# Altium PCB SENSEI_Base-Board.PcbDoc (part 7 of 10)
Units mm, origin at the board's own origin, x right, y up, seen from the top; angles counter-clockwise.
Board outline 51.6 x 28.1 mm, 8 copper layers (Top Sig/Pwr, GND1, Sig1, GND2, Sig2, Pwr, GND3, Bot Sig/Pwr), stack 1.53 mm thick; 209 components, 201 nets, 1031 pads, 2222 vias.
Unrouted connection lines stored in the file: 214.
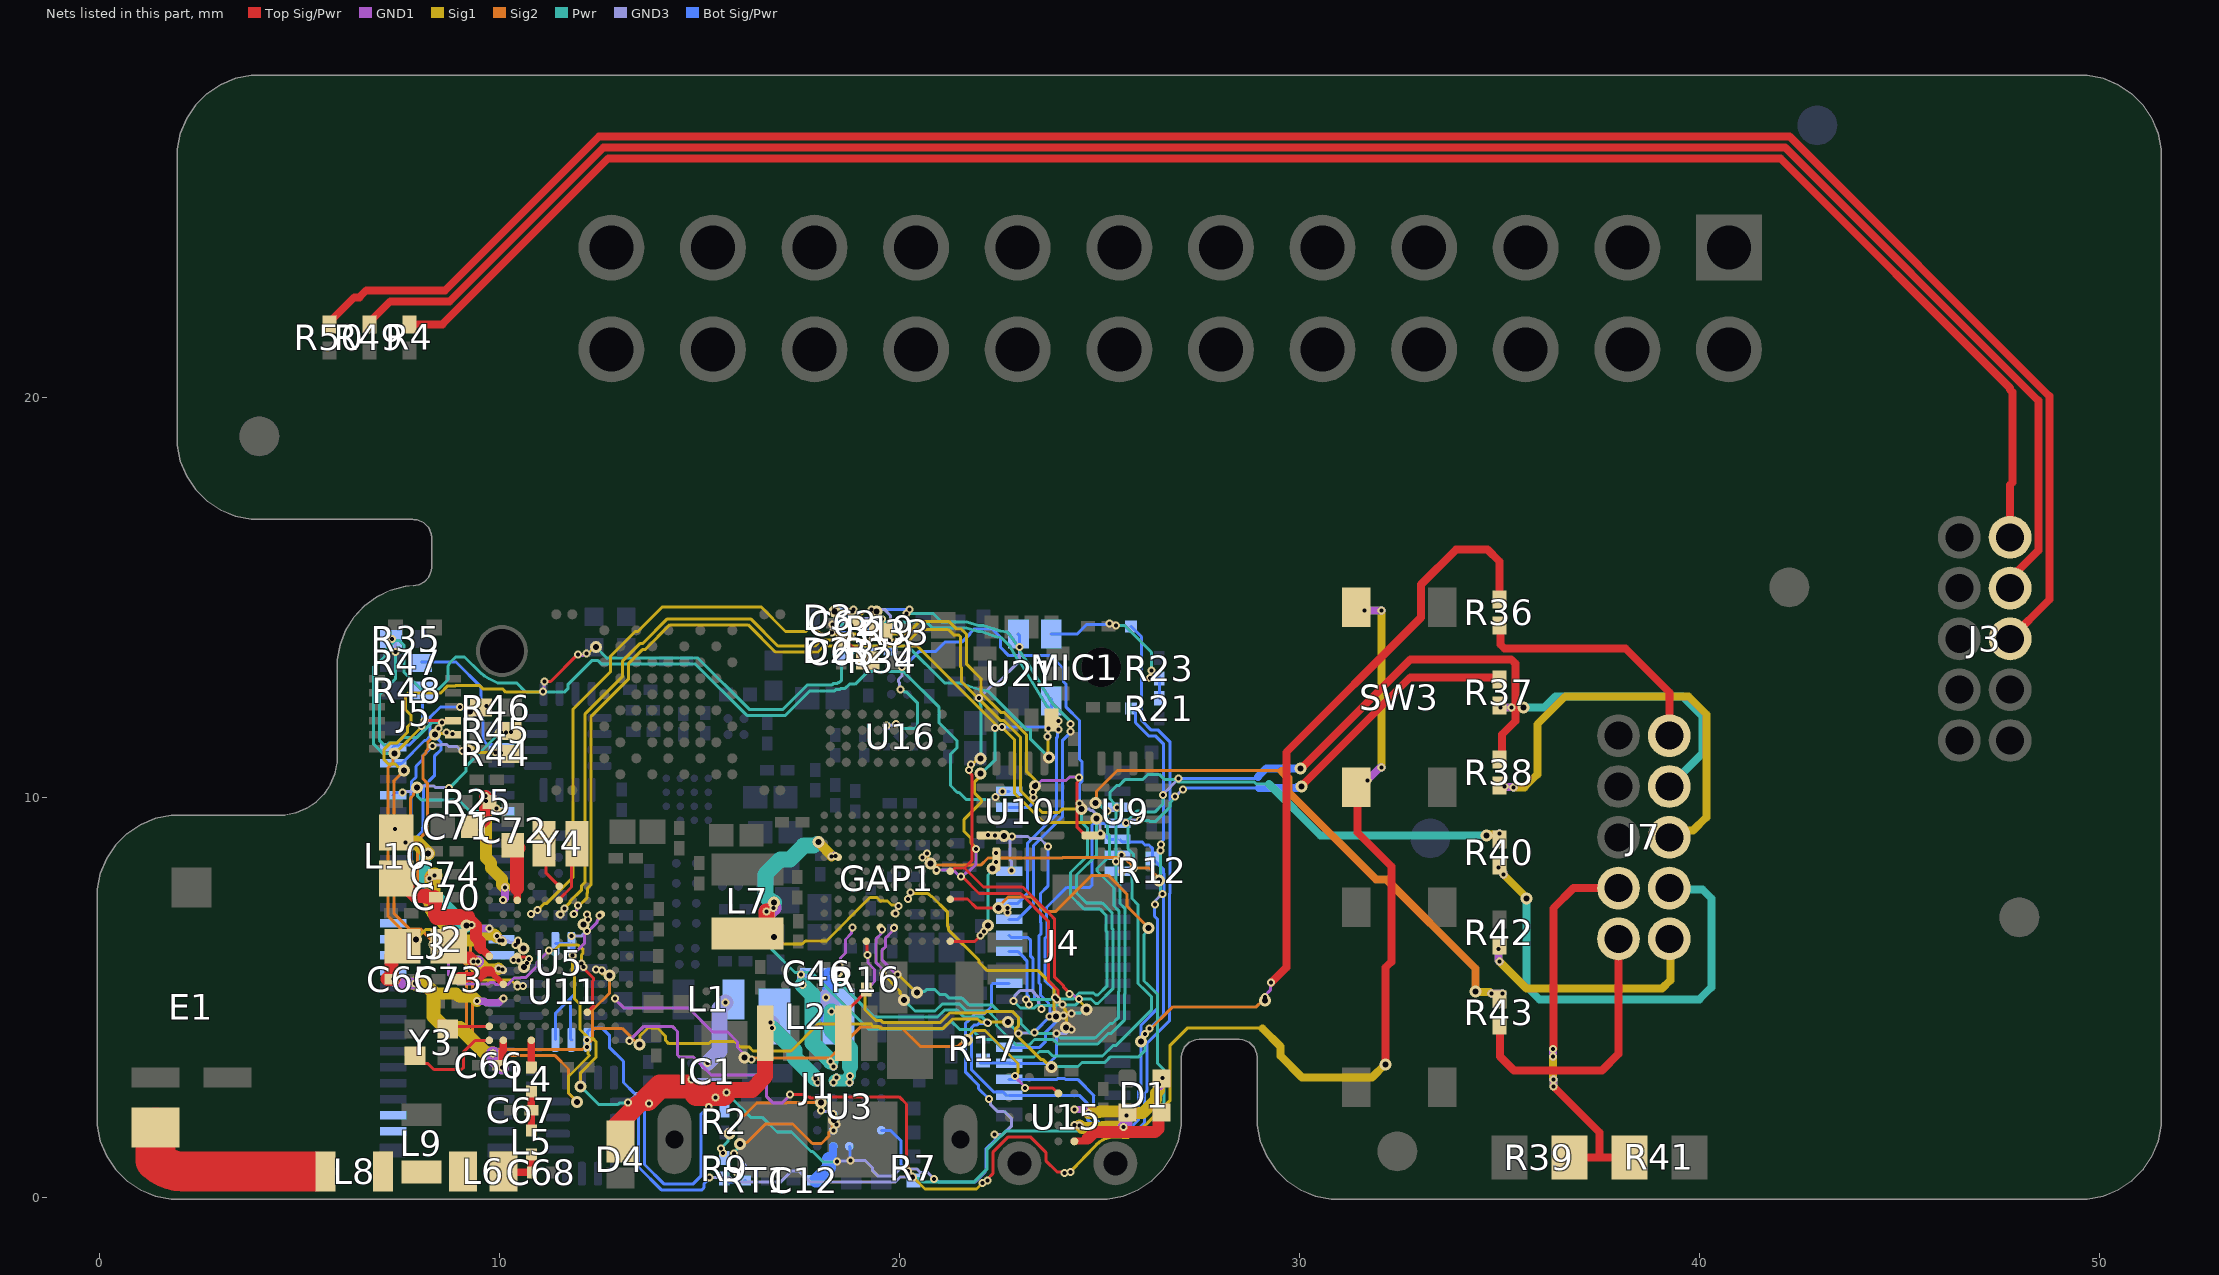
[diagram p12: the nets of this part, all layers, seen from the top]

## Via types
v1: diameter 0.2, hole 0.1, Top Sig/Pwr to GND1, 544 vias
v2: diameter 0.2, hole 0.1, GND3 to Bot Sig/Pwr, 436 vias
v3: diameter 0.2, hole 0.1, GND1 to Sig1, 385 vias
v4: diameter 0.3, hole 0.15, Sig1 to Pwr, 293 vias
v5: diameter 0.3, hole 0.15, Top Sig/Pwr to Bot Sig/Pwr, tented both sides, 284 vias
v6: diameter 0.2, hole 0.1, Pwr to GND3, 280 vias

## Nets (pads, with @x,y where several pads share a name; then routed paths per layer and width w, separated by ;. In a path a pad name is that pad's centre, name@x,y a point inside that pad or via, vN(x,y) a via of type N, cw(c..) or ccw(c..) an arc to the next point about the centre after c; other vN are vias at no path point) (continued)
I2C_B_SDA_GAP: GAP1.K4 U11.5 | length 31.4
  Top Sig/Pwr w0.075: GAP1.K4@21.275,7.45 21.285,7.46 21.705,7.46 21.939,7.226 v1(22.7,7.226)
  GND1 w0.075: v1(22.7,7.226) 22.7,7.124 v3(22.704,7.119)
  Sig2 w0.075: v4(22.483,7.231) 22.483,7.265 22.722,7.505 23.294,7.505 23.658,7.14 23.902,7.14 24.811,8.05 25.223,8.05 25.695,7.578 25.695,7.274 v4(26.233,6.736)
  GND3 w0.075: v2(15.25,0.5) 15.753,0.5 15.866,0.387 17.037,0.387 17.312,0.663 17.488,0.663 17.763,0.387 19.907,0.387 20.032,0.512 20.334,0.512 v6(20.348,0.499)
  Sig1 w0.075: v4(22.483,7.231) 22.526,7.188 22.602,7.188 22.671,7.119 v3(22.704,7.119)
  Pwr w0.075: v6(20.348,0.499) 20.372,0.475 20.5,0.475 20.587,0.387 21.875,0.387 22.187,0.7 22.187,1.187 22.529,1.528 22.534,1.528 22.668,1.663 26.311,1.663 26.613,1.964 26.613,3.193 26.461,3.344 26.461,5.071 26.208,5.324 26.204,5.324 26.12,5.408 26.12,6.569 26.217,6.666 v4@26.217,6.698
  Bot Sig/Pwr w0.075: U11.5@12.2,3.938 12.2,4.131 12.262,4.193 12.362,4.193 12.398,4.229 12.574,4.229 12.751,4.052 12.751,3.75 13.103,3.398 13.103,2.87 13.376,2.598 13.402,2.598 13.479,2.521 13.479,0.758 14.05,0.187 15.067,0.187 15.12,0.24 15.12,0.336 15.25,0.466 v2(15.25,0.5)
I2C_GAP_SEL: U5.H10 U11.6 U11.7 U11.14 U11.15 | length 5.2
  Top Sig/Pwr w0.075: v1(12.195,7.071) 12.196,7.071 U5.H10@12.2,7.075
  GND1 w0.075: v1(12.195,7.071) 12.208,7.058 12.208,6.961 v3(12.221,6.948)
  GND3 w0.075: v2(11.8,6.538) 12.062,6.538 12.181,6.657 v6(12.196,6.657)
  Sig1 w0.075: v4(12.099,6.825) v3(12.221,6.948)
  Pwr w0.075: v4(12.099,6.825) 12.099,6.788 12.196,6.691 v6(12.196,6.657)
  Bot Sig/Pwr w0.075: U11.7@11.4,3.942 11.4,4.593 11.782,4.975 ; U11.14@11.4,6.342 11.738,6.342 11.8,6.281 U11.15@11.8,6.184 ; U11.15@11.8,6.342 11.855,6.287 11.855,5.943 11.886,5.912 11.886,5.079 11.782,4.975 ; U11.6@11.813,3.929 11.782,3.961 11.782,4.975
IMU_INT1: U5.H3 U21.4 | length 34.8
  Top Sig/Pwr w0.075: v1(11.135,12.897) 11.286,12.897 v1(11.962,13.573) ; v1(12.106,5.761) 12.106,5.727 12.35,5.483 12.35,5.418 12.332,5.4 12.332,4.885 12.35,4.867 12.35,4.775 U5.H3@12.2,4.625
  GND1 w0.075: v3(8.581,6.141) 8.734,5.988 8.734,5.555 8.953,5.336 9.742,5.336 9.775,5.369 9.863,5.369 9.917,5.315 10.203,5.315 10.367,5.48 10.427,5.48 10.433,5.486 10.534,5.486 10.538,5.49 10.657,5.49 10.937,5.769 10.937,5.869 v3(11.24,6.173) ; v3(11.092,12.646) 11.113,12.667 11.113,12.875 v1(11.135,12.897) ; v1(11.962,13.573) 11.996,13.573 12.02,13.549 12.104,13.549 12.15,13.595 v3(12.184,13.595) ; v3(12.05,5.85) 12.05,5.817 v1(12.106,5.761) ; v3(23.7,11.523) 23.713,11.536 23.713,11.713 v1(23.725,11.725)
  Sig2 w0.075: v4(7.619,10.669) 7.619,10.665 7.373,10.419 7.373,7.087 7.75,6.711 8.022,6.711 8.376,6.356 v4(8.376,6.315)
  Sig1 w0.075: v4(7.619,10.669) 7.566,10.669 7.407,10.829 7.231,10.829 7.123,10.936 7.123,11.2 7.286,11.362 7.447,11.362 7.701,11.617 7.701,11.755 7.788,11.841 7.788,12.059 7.65,12.196 7.65,12.532 7.721,12.604 8.529,12.604 8.711,12.786 8.908,12.786 8.922,12.8 9.499,12.8 9.587,12.712 10.075,12.712 ; v4(8.376,6.315) 8.391,6.315 8.566,6.141 v3(8.581,6.141) ; 10.08,12.712 10.164,12.628 11.074,12.628 v3(11.092,12.646) ; v3(11.24,6.173) 11.252,6.184 11.382,6.184 11.508,6.31 11.971,6.31 12.096,6.186 12.096,6.105 12.054,6.063 12.054,5.854 v3(12.05,5.85) ; v3(12.184,13.595) 12.218,13.595 12.379,13.756 v4(12.415,13.756) ; v3(23.7,11.523) 23.719,11.505 23.719,11.019 v4(23.738,11)
  Pwr w0.075: v4(12.415,13.756) 12.692,13.479 14.97,13.479 16.249,12.201 17.092,12.201 17.705,12.813 18.323,12.813 18.359,12.849 18.457,12.849 18.481,12.873 18.508,12.873 18.552,12.917 18.552,13.315 19.024,13.788 20.202,13.788 21.128,12.861 21.498,12.861 22.017,12.687 22.083,12.687 22.223,12.649 23.171,11.7 23.275,11.7 23.275,11.463 v4(23.738,11)
IND_IN: GAP1.B7 L7.1 | length 4.5
  Top Sig/Pwr w0.15: v1(18.41,8.534) 18.431,8.534 18.466,8.5 GAP1.B7@18.475,8.5
  Top Sig/Pwr w0.4: L7.1@16.2,6.6 16.475,6.6 16.675,6.8 v1(16.675,7.15)
  GND1 w0.15: v1@18.376,8.568 18.362,8.568 18.315,8.521 v3(18.301,8.521) 18.307,8.528 18.404,8.528 v1(18.41,8.534)
  GND1 w0.4: v1(16.675,7.15) 16.759,7.15 16.846,7.237 v3(16.861,7.237)
  Sig1 w0.2: v3(16.861,7.237) 16.861,7.359 v4(16.873,7.371)
  Sig1 w0.25: v4(17.978,8.888) 17.978,8.874 18.301,8.551 v3(18.301,8.521)
  Pwr w0.3: 17.85,8.789 17.948,8.888 v4(17.978,8.888)
  Pwr w0.4: v4(16.873,7.371) 16.823,7.371 16.65,7.544 16.65,8.075 17.024,8.449 17.27,8.449 17.61,8.789 17.85,8.789
JTAG_T\R\S\T\: GAP1.F2 J4.3 R43.2 | length 27.7
  GND1 w0.075: v1(19.87,6.733) 19.87,6.7 19.74,6.57 19.74,6.567 19.658,6.485 19.658,6.272 19.572,6.186 19.572,5.924 19.921,5.575 v3(19.95,5.575)
  GND1 w0.2: v3(34.8,5.1) v1(35.075,5.1)
  Sig2 w0.075: v4(24.905,9.862) 24.935,9.892 24.935,10.159 25.447,10.671 29.54,10.671 29.558,10.653
  Sig2 w0.2: 29.558,10.653 29.725,10.486 29.725,10.14 31.923,7.943 32.183,7.943 34.4,5.726 v4(34.4,5.15)
  GND3 w0.075: v6(25.205,9.653) 25.229,9.677 25.346,9.677 25.415,9.745 v2(25.449,9.745)
  Sig1 w0.075: v3(19.95,5.575) 19.967,5.575 20.429,5.114 v4(20.446,5.114)
  Sig1 w0.2: v4(34.4,5.15) 34.419,5.131 34.769,5.131 v3(34.8,5.1)
  Pwr w0.075: v4(20.446,5.114) 20.479,5.147 20.634,5.147 20.677,5.19 20.894,5.19 21.017,5.067 21.158,5.067 21.246,4.979 21.571,4.979 21.739,4.811 22.311,4.811 22.473,4.649 22.821,4.649 23.047,4.423 23.047,4.333 23.287,4.093 23.913,4.093 24.026,3.98 24.896,3.98 25.157,4.241 25.168,4.241 25.271,4.344 25.329,4.344 25.486,4.501 25.486,5.15 25.487,7.162 25.365,7.283 25.365,7.734 24.943,8.156 24.943,8.218 25.253,8.529 25.253,9.05 25.205,9.098 v6(25.205,9.653) 25.171,9.653 24.962,9.862 v4(24.905,9.862)
JTAG_TCK: GAP1.G4 J4.5 R37.2 | length 23.6
  Top Sig/Pwr w0.2: v5(30.05,10.275) 32.775,13 R37.2@35,13
  GND1 w0.075: v1(20.216,7.457) 20.24,7.481 20.24,7.557 20.275,7.591 v3(20.275,7.625)
  GND3 w0.075: v6(23.752,4.519) 23.752,4.531 23.897,4.675 v2(23.897,4.99) ; v2(25.669,9.362) 25.7,9.362 25.776,9.438 v6(26.023,9.438) ; v6(26.894,10.025) 26.908,10.025 27.082,10.199 v2(27.097,10.199)
  Sig1 w0.075: v3(20.275,7.625) 20.299,7.601 20.711,7.601 20.749,7.563 20.755,7.563 20.799,7.519 20.82,7.519 21.199,7.14 21.199,6.79 21.226,6.764 21.226,6.691 21.992,5.925 21.992,5.873 22.201,5.665 23.472,5.665 23.863,5.275 23.863,4.729 23.88,4.712 23.88,4.569 v4(23.923,4.526)
  Pwr w0.075: v6(23.752,4.519) 23.755,4.522 23.92,4.522 v4(23.923,4.526) ; v6(26.023,9.438) 26.043,9.417 26.235,9.417 26.253,9.4 26.411,9.4 26.763,9.752 26.763,9.86 26.894,9.991 v6(26.894,10.025)
  Bot Sig/Pwr w0.075: v2(23.897,4.99) 23.873,5.014 23.873,5.193 23.638,5.428 23.638,6.469 23.696,6.527 23.696,6.921 23.68,6.936 23.68,7.242 24.188,7.75 24.769,7.75 24.813,7.794 24.813,9.3 24.856,9.344 J4.5@25.442,9.344 ; J4.5@25.455,9.35 25.467,9.362 v2(25.669,9.362) ; v2(27.097,10.199) 27.121,10.223 27.18,10.223 27.195,10.237 28.987,10.237
  Bot Sig/Pwr w0.2: 28.987,10.237 29.926,10.237 29.945,10.256 30.031,10.256 v5(30.05,10.275)
JTAG_TDI: GAP1.E2 J4.9 R40.2 | length 25.5
  GND1 w0.075: v1(19.567,6.7) 19.543,6.676 19.543,6.583 19.422,6.462 19.422,5.862 19.566,5.718 19.566,5.605 v3(19.59,5.581)
  GND1 w0.2: v1(34.987,8.874) 35,8.886 v3(35,9.1)
  GND3 w0.075: v6(25.417,8.392) 25.417,8.401 25.561,8.545 v2(25.561,8.554)
  Sig1 w0.075: v3(19.59,5.581) 20.023,5.147 20.023,5.086 20.121,4.988 v4(20.121,4.928)
  Sig1 w0.2: v4(34.675,9.05) 34.694,9.069 34.969,9.069 v3(35,9.1)
  Pwr w0.075: v4(20.121,4.928) 20.392,4.656 20.894,4.656 21.067,4.829 21.509,4.829 21.677,4.661 22.215,4.661 22.432,4.444 22.432,4.296 22.922,3.806 23.246,3.806 23.383,3.943 23.849,3.943 23.962,3.83 24.958,3.83 25.219,4.091 25.288,4.091 25.636,4.439 25.636,5.088 ; 25.637,5.088 25.637,7.224 25.515,7.345 25.515,7.796 25.417,7.894 v6(25.417,8.392) 25.417,9.739 25.38,9.777 25.38,9.779 25.358,9.8 25.358,9.869 25.272,9.956 25.272,10.132 25.431,10.291 25.49,10.291 25.65,10.451 26.095,10.451 26.219,10.575 26.496,10.575 26.621,10.451 26.905,10.451 26.968,10.388 28.868,10.388 28.923,10.332 29.244,10.332 29.246,10.33
  Pwr w0.2: 29.246,10.33 30.526,9.05 v4(34.675,9.05)
JTAG_TDO: GAP1.F3 J4.11 R38.2 | length 35
  Top Sig/Pwr w0.2: v5(30.025,10.725) 30.052,10.725 32.777,13.45 35.297,13.45 35.4,13.347 35.4,11.903 35.072,11.575 35.072,11.072 R38.2@35,11
  GND1 w0.075: v1(19.909,7.1) 19.933,7.124 19.933,7.205 19.977,7.249 v3(19.977,7.283)
  GND3 w0.075: v2(25.569,8.147) 25.602,8.147 25.653,8.198 25.826,8.198 v6(25.85,8.222) ; v6(26.587,10.057) 26.587,10.072 26.975,10.46 v2(26.975,10.475)
  Sig1 w0.075: v4(16.861,6.511) 16.922,6.511 16.992,6.441 16.999,6.441 17.107,6.334 17.574,6.334 17.649,6.41 18.18,6.41 19.264,7.493 19.442,7.493 19.526,7.409 19.703,7.409 19.806,7.306 19.953,7.306 v3(19.977,7.283)
  Pwr w0.075: v4(16.861,6.511) 16.818,6.468 16.818,6.294 16.81,6.286 16.81,6.204 17.395,5.619 17.811,5.619 19.217,4.213 20.032,4.213 20.038,4.206 21.081,4.206 21.254,4.379 21.322,4.379 21.508,4.193 21.803,4.193 21.996,4 22.063,4 22.113,3.95 22.348,3.95 22.792,3.506 23.37,3.506 23.507,3.643 23.724,3.643 23.837,3.53 25.083,3.53 25.344,3.791 25.412,3.791 26.311,4.69 26.311,5.009 26.157,5.162 26.154,5.162 25.97,5.346 25.97,7.315 25.815,7.47 25.815,7.918 ; 25.815,7.919 25.815,8.076 25.826,8.087 25.826,8.198 v6(25.85,8.222) 25.85,8.584 25.717,8.716 25.717,9.432 25.937,9.653 26.142,9.653 26.166,9.628 26.383,9.628 26.561,9.805 26.561,9.807 26.587,9.834 v6(26.587,10.057)
  Bot Sig/Pwr w0.075: v2(26.975,10.475) 28.925,10.475 28.962,10.512
  Bot Sig/Pwr w0.2: 28.962,10.512 29.175,10.725 v5(30.025,10.725)
JTAG_TMS/CS_RAM_GATE: GAP1.D1 J4.7 R12.2 R36.2 U16.2 | length 48.4
  Top Sig/Pwr w0.075: GAP1.D1@19.175,6.4 19.191,6.384 19.191,6.074 v1(19.206,6.059)
  Top Sig/Pwr w0.2: v1(29.299,5.373) v1(29.299,5.373) 29.675,5.748 29.675,11.125 33.044,14.494 33.044,15.318 33.923,16.196 34.704,16.196 35,15.9 R36.2@35,15
  GND1 w0.075: v1(19.206,6.059) 19.216,6.048 19.216,5.856 19.378,5.694 19.378,5.393 19.275,5.29 19.275,5.197 v3(19.251,5.173) ; v3(29.143,5.012) 29.143,5.046 29.275,5.177 29.275,5.349 v1(29.299,5.373)
  Sig2 w0.075: v4(26.038,3.9) 26.038,3.909 26.218,4.09 26.218,4.143 26.838,4.763 28.927,4.763 29.085,4.92 v4(29.141,4.92)
  GND3 w0.075: v2(19.685,11.789) 19.708,11.813 19.9,11.813 v6(19.924,11.836) ; v6(20.025,12.7) 20.001,12.724 20.001,12.865 19.978,12.888 19.978,12.95 20.066,13.038 v2(20.066,13.261) ; v2(24.51,9.84) 24.544,9.84 24.671,9.713 24.737,9.713 24.777,9.673 24.827,9.673 24.951,9.549 24.951,9.523 25.013,9.462 25.013,9.104 v2(25.025,9.091) ; v6(26.139,4.078) 26.139,4.09 26.26,4.211 v2(26.26,4.222)
  Sig1 w0.075: v3@19.249,5.173 19.249,5.168 19.148,5.067 19.148,4.68 19.342,4.486 19.349,4.486 19.41,4.425 19.539,4.425 19.6,4.365 21.018,4.365 21.264,4.61 22.137,4.61 22.177,4.649 22.821,4.649 22.975,4.495 22.975,4.278 22.901,4.204 22.901,4.082 23.533,3.449 23.586,3.449 23.784,3.251 v4(23.804,3.251) ; v4(29.141,4.92) 29.143,4.922 v3(29.143,5.012)
  Pwr w0.075: v6(19.924,11.836) 19.958,11.836 20.077,11.716 20.383,11.716 20.458,11.792 20.458,12.354 20.175,12.638 20.121,12.638 20.059,12.7 v6(20.025,12.7) ; v4(23.804,3.251) 23.821,3.268 24.466,3.268 24.568,3.371 24.786,3.371 24.79,3.366 25.131,3.366 25.276,3.511 25.987,3.511 26.139,3.663 26.139,3.9 26.09,3.95 26.09,3.995 v6@26.139,4.045 ; v4(26.038,3.9) 26.038,3.943 v6@26.139,4.045 ; v6@26.139,4.048 v6@26.139,4.045 ; v6(26.139,4.078) v6@26.139,4.045
  Bot Sig/Pwr w0.075: v2(20.066,13.261) 20.112,13.261 20.502,13.65 20.916,13.65 21.153,13.888 21.572,13.888 21.763,14.078 21.763,14.097 21.878,14.213 22.322,14.213 22.531,14.003 22.531,13.75 22.74,13.541 23.787,13.541 24.106,13.223 24.106,12.888 24.172,12.822 24.172,12.253 24.504,11.92 24.504,10.95 24.572,10.882 24.572,10.409 24.51,10.347 v2(24.51,9.84) ; v2(25.025,9.091) 25.039,9.077 25.113,9.077 25.24,8.95 J4.7@25.455,8.95 ; J4.7@25.526,8.935 25.575,8.886 26.067,8.886 26.144,8.809 26.243,8.809 26.325,8.728 R12.2@26.325,8.475 26.611,8.189 26.611,8.098 26.613,8.097 26.613,7.653 26.611,7.652 26.611,4.571 26.263,4.222 v2(26.26,4.222)
LED_EN: U5.K4 U15.A1 | length 13.9
  Top Sig/Pwr w0.075: v1(12.895,4.971) U5.K4@12.9,4.975 ; v1(23.142,2.733) 23.836,2.733 23.961,2.608 U15.A1@23.981,2.608
  GND1 w0.075: v1(12.895,4.971) 12.895,4.953 13.11,4.738 14.728,4.738 15.339,4.127 15.717,4.127 15.958,3.885 15.958,3.743 16.093,3.608 16.148,3.608 v3(16.307,3.449) ; v3(22.888,3.034) 22.888,3.011 23.142,2.757 v1(23.142,2.733)
  Sig2 w0.075: v4(16.131,3.499) 16.142,3.488 18.265,3.488 19.039,4.261 19.526,4.261 19.572,4.215 20.082,4.215 20.524,3.773 21.476,3.773 21.633,3.931 v4(21.694,3.931)
  Sig1 w0.075: v4(16.131,3.499) 16.157,3.473 16.283,3.473 v3(16.307,3.449) ; v4(21.694,3.931) 21.694,3.989 21.875,4.17 22.143,4.17 22.967,3.346 22.967,3.114 22.944,3.091 22.944,3.085 22.893,3.034 v3(22.888,3.034)
MIC_CLK: GAP1.J6 J4.36 MIC1.6 R17.2 | length 16
  Top Sig/Pwr w0.075: GAP1.J6@20.925,8.15 20.925,8.179 v1(20.934,8.188) ; v1(21.544,8.018) 21.571,8.018 21.995,7.595 23.034,7.595 23.727,6.902 23.727,5.42 23.969,5.177 23.969,4.974 v1(23.945,4.95)
  GND1 w0.075: v1(20.934,8.188) 21.34,8.188 21.51,8.018 v1(21.544,8.018) 21.578,8.018 21.708,8.149 21.745,8.149 21.915,8.319 v3(21.915,8.704) ; v1(23.945,4.95) v1(23.945,4.95) 24.075,4.819 v3(24.075,4.817)
  GND3 w0.075: v6(22.397,11.736) 22.407,11.746 22.555,11.746 v2(22.565,11.756) ; v2(23.935,4.1) 24.179,4.1 24.271,4.192 v6(24.304,4.192)
  Sig1 w0.075: 21.886,10.103 22.05,9.938 22.05,9.876 21.624,9.45 21.624,9.143 21.791,8.975 21.791,8.861 21.915,8.737 v3(21.915,8.704) ; 21.886,10.103 21.886,10.389 22.035,10.538 v4(22.035,10.599) ; v3(24.075,4.817) 24.075,4.784 24.138,4.721 24.138,4.682 24.186,4.634 24.186,4.259 v4(24.17,4.243)
  Pwr w0.075: v4(22.035,10.599) 22.058,10.599 22.397,10.938 v6(22.397,11.736) ; v4(24.17,4.243) 24.253,4.243 v6(24.304,4.192)
  Bot Sig/Pwr w0.075: R17.2@22.013,3.362 22.745,3.362 J4.36@22.779,3.362 ; v2(22.565,11.756) 23.731,11.756 23.806,11.831 MIC1.6@23.806,12.454 ; J4.36@22.745,3.343 22.779,3.343 23.731,3.343 23.935,3.546 v2(23.935,4.1)
MIC_DATA: GAP1.K6 J4.34 MIC1.1 | length 14.9
  Top Sig/Pwr w0.075: GAP1.K6@21.275,8.15 21.305,8.15 21.386,8.231 21.632,8.231 ; v1(21.737,10.677) 21.737,10.637 21.812,10.562 21.812,8.411 21.632,8.231 ; v1(24.261,5.079) 24.261,5.098 24.109,5.25 24.109,5.281 23.877,5.513 23.877,6.964 23.778,7.062 23.084,7.756 22.106,7.756 21.632,8.231
  GND1 w0.075: v1(21.737,10.677) 21.761,10.701 21.761,10.757 21.787,10.782 v3(21.787,10.816) ; v1(24.261,5.079) 24.269,5.071 24.342,5.071 24.461,4.952 v3(24.495,4.952)
  GND3 w0.075: v6(21.994,12.476) 22.361,12.844 22.444,12.844 22.999,13.398 v2(22.999,13.763) ; v2(24.109,4.547) 24.131,4.569 24.289,4.569 v6(24.31,4.59)
  Sig1 w0.075: v3(21.787,10.816) 21.82,10.816 21.978,10.974 v4(22.035,10.974) ; v3(24.495,4.952) 24.495,4.918 24.682,4.73 v4(24.682,4.695)
  Pwr w0.075: v6(21.994,12.476) 22.037,12.288 22.037,10.975 v4(22.035,10.974) ; v6(24.31,4.59) 24.325,4.605 24.531,4.605 24.621,4.695 v4(24.682,4.695)
  Bot Sig/Pwr w0.075: J4.34@22.745,3.75 23.508,3.75 23.661,3.903 23.661,4.128 24.081,4.547 v2(24.109,4.547) ; MIC1.1@22.965,14.086 22.999,14.051 v2(22.999,13.763)
MIC_THSEL: GAP1.H7 J4.38 MIC1.5 | length 21.9
  GND1 w0.075: v1(20.579,8.501) 20.587,8.501 20.68,8.594 v3(20.688,8.594)
  Sig2 w0.075: v4(20.776,8.346) 20.818,8.304 21.076,8.304 21.078,8.302 22.034,8.302 22.216,8.484 24.076,8.484 24.092,8.5 25.611,8.5 25.881,8.23 26.246,8.23 26.407,8.069 26.407,8.049 26.495,7.961 v4(26.495,7.921)
  GND3 w0.075: v2(26.393,7.325) 26.403,7.335 26.403,7.419 26.561,7.576 v6(26.582,7.576) ; v6(26.533,8.667) 26.541,8.674 26.541,8.814 v2(26.549,8.822)
  Sig1 w0.075: v3(20.688,8.594) 20.712,8.57 20.712,8.505 20.733,8.484 20.733,8.389 v4(20.776,8.346)
  Pwr w0.075: v4@26.411,7.872 26.411,7.932 26.533,8.055 v6(26.533,8.667) ; v4(26.495,7.921) 26.439,7.865 26.486,7.865 26.534,7.817 26.534,7.659 26.582,7.61 v6(26.582,7.576)
  Bot Sig/Pwr w0.075: J4.38@22.745,2.95 23.944,2.95 23.96,2.966 24.136,2.966 24.152,2.95 24.458,2.95 24.862,2.546 24.852,2.535 24.852,2.014 25.078,1.787 25.832,1.787 25.978,1.934 25.978,2.657 26.048,2.726 26.048,4.31 26.461,4.724 26.461,6.946 26.379,7.028 26.379,7.311 v2(26.393,7.325) ; MIC1.5@25.79,12.225 25.903,12.113 25.903,11.865 26.241,11.527 26.413,11.527 26.611,11.329 26.611,8.947 26.593,8.929 26.573,8.909 26.573,8.846 v2(26.549,8.822)
MIC_WAKE: GAP1.C2 J4.40 MIC1.4 | length 25.8
  GND1 w0.075: v3(18.503,5.801) 18.527,5.825 18.527,5.983 18.653,6.108 18.653,6.444 18.807,6.599 18.807,6.717 v1(18.831,6.741)
  GND3 w0.075: v2(22.197,4.37) 22.211,4.356 v6(22.22,4.356)
  Sig1 w0.075: v4(18.46,5.637) 18.482,5.658 18.482,5.78 v3(18.503,5.801)
  Pwr w0.075: v4(18.46,5.637) 18.5,5.596 18.5,5.375 19.362,4.513 20.156,4.513 20.163,4.506 20.956,4.506 21.129,4.679 21.446,4.679 21.615,4.511 22.064,4.511 v6(22.22,4.356)
  Bot Sig/Pwr w0.075: v2(22.197,4.37) 22.173,4.346 21.986,4.346 21.947,4.307 21.871,4.307 21.805,4.241 21.805,4.105 21.799,4.099 21.799,3.585 21.799,3.198 22.369,2.628 22.598,2.628 J4.40@22.686,2.54 ; J4.40@22.745,2.55 23.951,2.55 23.96,2.541 24.136,2.541 24.145,2.55 24.5,2.55 24.702,2.348 24.702,1.952 24.81,1.844 24.81,1.825 24.998,1.637 25.894,1.637 26.128,1.872 26.128,2.595 26.198,2.664 26.198,3.859 26.761,4.423 26.761,7.59 26.763,7.591 26.763,8.146 26.763,9.698 26.763,11.302 26.762,11.389 26.475,11.677 26.322,11.677 ; MIC1.4@25.79,14.275 26.053,14.012 26.053,11.927 26.302,11.678 26.321,11.678
MSP_CS: J2.12 U5.C7 | length 0.7
  Top Sig/Pwr w0.075: U5.C7@10.45,6.025 10.472,6.003 10.655,6.003 10.706,5.952 v1(10.739,5.952)
  GND1 w0.075: v3(10.699,5.852) 10.699,5.878 10.716,5.895 10.716,5.928 v1(10.739,5.952)
  GND3 w0.075: v2(10.357,5.935) 10.364,5.928 10.472,5.928 v6(10.479,5.921)
  Sig1 w0.075: v4(10.615,5.757) 10.615,5.767 v3(10.699,5.852)
MSP_DR1: J2.13 U5.C8 | length 1.1
  Top Sig/Pwr w0.075: U5.C8@10.45,6.375 10.45,6.401 v1(10.466,6.417)
  GND1 w0.075: v3(10.399,6.309) 10.399,6.33 10.466,6.396 v1(10.466,6.417)
  GND3 w0.075: v2(10.009,6.414) 10.223,6.414 10.265,6.373 10.47,6.373 v6(10.473,6.376)
  Sig1 w0.075: v3(10.399,6.309) 10.433,6.309 10.479,6.263 10.563,6.263 v4(10.606,6.22)
  Pwr w0.075: v6(10.473,6.376) 10.473,6.364 10.606,6.231 v4(10.606,6.22)
MSP_DR2: J2.21 U5.H1 | length 15.2
  Top Sig/Pwr w0.075: v1(12.193,3.931) U5.H1@12.2,3.925
  GND1 w0.075: v3(12.193,3.756) v1(12.193,3.931)
  Sig2 w0.075: v4(7.94,10.244) 7.94,10.184 7.855,10.098 7.855,10.055 7.786,9.986 7.786,7.698 8.138,7.346 8.138,7.319 8.46,6.996 8.46,6.932 9.134,6.258 9.134,5.853 9.176,5.811 9.176,4.06 9.687,3.55 11.384,3.55 11.729,3.205 11.729,2.604 v4(11.945,2.388)
  GND3 w0.075: v6(9.925,9.725) 9.959,9.725 10.015,9.669 10.082,9.669 v2(10.106,9.645)
  Sig1 w0.075: v4(11.945,2.388) 11.727,2.605 11.727,3.02 12.253,3.546 12.217,3.582 12.217,3.732 v3(12.193,3.756)
  Pwr w0.075: v4(7.94,10.244) 7.95,10.234 7.95,10.032 8.051,9.931 8.987,9.931 9.27,9.648 9.542,9.648 9.619,9.725 v6(9.925,9.725)
  Bot Sig/Pwr w0.075: J2.21@10.055,9.65 10.101,9.65 v2(10.106,9.645)
MSP_T\R\S\T\: J2.50
MSP_TCK: J2.49
MSP_TDI: J2.39
MSP_TDO: J2.38
MSP_TMS: J2.40
MSP_VCC: J2.37
NetC12_1: C12.1 U3.D1 | length 1.1
  Bot Sig/Pwr w0.2: 18.247,0.957 18.346,1.057 18.346,1.271 U3.D1@18.35,1.275
  Bot Sig/Pwr w0.35: C12.1@17.916,0.425 17.962,0.425 17.968,0.431 17.968,0.469 18.247,0.747 18.247,0.957
NetC46_1: C46.1 L2.1 U3.C5 U3.D5 | length 4
  GND3 w0.2: v2(18.35,2.875) 18.425,2.95 v6(18.425,3) ; v2(18.75,2.875) 18.75,3.012 v6(18.767,3.029)
  GND3 w0.4: v2(18.173,4.993) 18.3,4.866 v6(18.3,4.65)
  Pwr w0.3: v6@18.375,2.925 18.647,2.925 18.765,3.043 18.765,3.265
  Pwr w0.4: v6(18.3,4.65) 18.3,4.19 18.765,3.725 18.765,3.265
  Bot Sig/Pwr w0.35: L2.1@18.252,4.577 C46.1@18.252,5.569
  Bot Sig/Pwr w0.4: L2.1@18.2,4.525 L2.1@18.252,4.577
NetC46_2: C46.2 U3.D6 | length 2.7
  GND3 w0.2: v2(17.537,5.566) 17.537,5.355 v6(17.585,5.306) ; v6(18.283,3.401) 18.283,3.342 v2(18.35,3.275)
  Pwr w0.4: v6(17.585,5.306) 17.825,5.067 17.825,3.858 v6(18.283,3.401)
  Bot Sig/Pwr w0.2: v2(17.537,5.566) 17.562,5.566 C46.2@17.596,5.6
NetC62_1: C62.1 R19.2 R33.1 | length 3.4
  Top Sig/Pwr w0.075: v1(18.7,14.65) 18.818,14.532 18.818,14.444 18.895,14.367 18.983,14.367 19.094,14.256 19.094,14.238 19.207,14.125 R33.1@19.609,14.125
  GND1 w0.075: v1(18.7,14.65) v3(18.824,14.65)
  GND3 w0.075: v6(18.85,14.7) 19.079,14.471 19.549,14.471 v2(19.565,14.455)
  Sig1 w0.075: v4(18.375,14.65) v3(18.824,14.65)
  Pwr w0.075: v4(18.375,14.65) 18.766,14.65 18.816,14.7 v6(18.85,14.7)
  Bot Sig/Pwr w0.075: v2(19.565,14.455) 19.589,14.431 19.589,14.386 19.75,14.225 R19.2@19.8,14.225
NetC63_1: C63.1 R20.2 R34.1 | length 3.7
  Top Sig/Pwr w0.075: C63.1@18.532,13.943 18.607,14.019 v1@18.716,14.019 ; v1(18.775,14.044) 18.687,13.955 18.687,13.893 19.1,13.48 R34.1@19.1,13.475
  GND1 w0.075: v1(18.775,14.044) 18.788,14.056 18.788,14.279 v3(18.8,14.292)
  GND3 w0.075: v6@19.275,14.7 v6(19.3,14.7) ; v6@19.275,14.725 v6(19.3,14.7) ; v2(19.746,13.924) 19.746,13.943 19.78,13.977 19.78,14.54 19.621,14.7 v6(19.3,14.7)
  Sig1 w0.075: v3@18.775,14.3 19.125,14.65 v4(19.429,14.65)
  Pwr w0.075: v6(19.3,14.7) 19.379,14.7 v4(19.429,14.65)
  Bot Sig/Pwr w0.075: v2(19.746,13.924) 19.746,13.704 R20.2@19.775,13.675
NetC65_1: C65.1 C66.1 L3.1 U5.B1 U5.B4 | length 7.8
  Top Sig/Pwr w0.18: 10.076,3.639 10.098,3.661 10.098,3.923 U5.B1@10.1,3.925 ; v1(10.1,4.969) U5.B4@10.1,4.975
  Top Sig/Pwr w0.2: 10.076,3.639 10.076,3.272 C66.1@10.092,3.257
  Top Sig/Pwr w0.35: C65.1@7.204,5.452 7.304,5.452 C65.1@7.308,5.456 ; v1(7.355,5.456) C65.1@7.308,5.456 ; L3.1@7.583,6.275 7.562,6.275 7.308,6.021 C65.1@7.308,5.456
  GND1 w0.18: v3(9.446,4.904) 9.45,4.9 9.633,4.9 9.671,4.862 9.988,4.862 10.095,4.969 v1(10.1,4.969)
  GND1 w0.3: v1(7.355,5.456) 7.466,5.345 v3(7.889,5.345)
  GND1 w0.35: v3(9.843,3.6) 9.843,3.473 v1(10.069,3.247)
  Sig1 w0.3: 8.179,5.251 8.197,5.269 ; 8.325,5.105 8.34,5.09 8.919,5.09 8.992,5.017 9.333,5.017 v3(9.446,4.904)
  Sig1 w0.35: v3(7.889,5.345) 8.111,5.345 8.116,5.35 8.35,5.116 8.35,4.525 8.642,4.234 9.021,4.234 9.654,3.6 v3(9.843,3.6)
NetC67_1: C67.1 L4.2 L5.1 | length 1
  Top Sig/Pwr w0.185: L5.1@10.8,1.625 L5.1@10.8,1.675 10.8,2.025 C67.1@10.8,2.15 ; C67.1@10.8,2.179 L4.2@10.8,2.65
NetC68_1: C68.1 L5.2 L6.1 | length 1
  Top Sig/Pwr w0.185: L6.1@10.175,0.65 10.2,0.625 10.787,0.625 10.8,0.638 L5.2@10.8,0.975
NetC70_1: C70.1 L10.1 U5.A7 | length 3.8
  Top Sig/Pwr w0.18: 9.518,6.269 9.518,6.185 9.529,6.174 9.598,6.174 9.747,6.025 U5.A7@9.75,6.025
  Top Sig/Pwr w0.3: 9.187,7.013 9.271,6.929 9.281,6.929 9.413,6.797 9.413,6.497 9.518,6.391 9.518,6.269
  Top Sig/Pwr w0.35: L10.1@7.298,8.045 7.388,8.045 7.902,7.531 8.181,7.531 8.206,7.506 8.364,7.506 8.371,7.5 8.385,7.5 8.391,7.494 8.391,7.069 8.447,7.013
  Top Sig/Pwr w0.4: 8.447,7.013 9.187,7.013
NetC71_1: C71.1 R25.1 U5.B11 | length 3.6
  Top Sig/Pwr w0.18: v1(10.097,7.427) U5.B11@10.1,7.425
  Top Sig/Pwr w0.3: C71.1@9.598,9.386 9.642,9.43 9.642,9.998 9.667,10.023 9.663,10.023 v1(9.657,10.03)
  GND1 w0.2: v1(10.097,7.427) 10.143,7.473 v3(10.143,7.742)
  GND1 w0.3: v3(9.668,9.912) 9.668,10.019 v1(9.657,10.03) 9.657,9.956 v3@9.669,9.944
  Sig1 w0.3: v3(9.668,9.912) 9.668,8.486 9.792,8.362 9.792,8.233 9.797,8.228 10.072,7.953 10.072,7.813 v3(10.143,7.742)
NetC72_1: C72.1 U5.C11 | length 1.3
  Top Sig/Pwr w0.18: 10.445,7.724 10.448,7.722 10.448,7.427 U5.C11@10.45,7.425
  Top Sig/Pwr w0.35: 10.445,7.724 10.445,8.69 C72.1@10.482,8.726
NetC73_1: C73.1 U5.B5 | length 1.3
  Top Sig/Pwr w0.15: 9.776,5.646 10.096,5.325 U5.B5@10.1,5.325
  Top Sig/Pwr w0.25: C73.1@9,5.5 9.006,5.506 9.506,5.506 9.647,5.647 9.776,5.647
NetC74_1: C74.1 U5.B8 | length 3.5
  Top Sig/Pwr w0.18: v1(10.075,6.425) 10.075,6.4 U5.B8@10.1,6.375
  Top Sig/Pwr w0.2: v1(8.25,7.975) 8.25,7.994 8.331,8.075 C74.1@8.346,8.075
  GND1 w0.18: v3(9.944,6.53) 9.95,6.53 10.051,6.429 10.071,6.429 v1(10.075,6.425)
  GND1 w0.2: v1(8.25,7.975) 8.325,8.05 v3(8.375,8.05)
  Sig1 w0.3: 8.331,7.212 8.331,7.113 9.02,6.425 9.37,6.425 9.422,6.477 9.445,6.477 9.541,6.573 9.869,6.573 v3@9.933,6.509
  Sig1 w0.4: 8.331,7.212 8.331,8.006 v3(8.375,8.05)
NetD1_2: D1.2 U15.B2 | length 2.9
  Top Sig/Pwr w0.18: U15.B2@24.375,2.2 24.379,2.204 24.381,2.204 v1(24.377,2.2)
  GND1 w0.18: v1(24.377,2.2) 24.381,2.196 24.631,2.196 24.723,2.103 v3(24.728,2.103)
  GND1 w0.3: v3(26.49,2.822) 26.49,2.903 v1(26.574,2.987)
  Sig1 w0.3: v3(24.728,2.103) 24.786,2.103 24.891,2.103 25.008,2.137 25.02,2.15 25.763,2.15 25.809,2.103 26.081,2.103 26.422,2.444 26.422,2.607 26.49,2.675 v3(26.49,2.822)
NetD1_3: D1.3 U15.D2 | length 2.7
  Top Sig/Pwr w0.18: U15.D2@24.375,1.4 24.379,1.404 24.647,1.404 24.707,1.464
  Top Sig/Pwr w0.3: 24.707,1.464 24.876,1.633 26.394,1.633 26.475,1.713 26.475,2.065 D1.3@26.57,2.16
NetD1_4: D1.4 U15.C2 | length 1.6
  Top Sig/Pwr w0.18: U15.C2@24.375,1.8 v1(24.375,1.802)
  GND1 w0.18: v1(24.375,1.802) 24.377,1.8 24.508,1.8 v3(24.511,1.798)
  GND1 w0.3: v3(25.607,1.751) 25.679,1.823 v1(25.679,2.05)
  Sig1 w0.3: v3(24.511,1.798) 24.507,1.794 24.573,1.728 25.046,1.728 25.081,1.762 25.176,1.775 25.607,1.775 v3(25.607,1.751)
NetD2_1: D2.1 J4.16 R20.1 | length 14
  GND3 w0.075: v2(18.314,14.114) 18.32,14.119 18.32,14.32 v6(18.325,14.325) ; v2(23.975,11.7) v2(23.975,11.7) 23.976,11.901 v6(23.977,11.902)
  Pwr w0.075: v6(18.325,14.325) 18.713,14.325 18.775,14.388 19.32,14.388 19.538,14.387 20.673,14.388 20.823,14.237 21.65,14.237 cw(c21.65,14.162) 21.672,14.234 21.895,14.167 21.966,14.146 22.043,14.146 22.443,14.01 22.56,13.986 22.582,13.964 22.761,13.785 22.964,13.435 23.007,13.39 23.687,12.28 23.971,11.996 23.971,11.908 v6(23.977,11.902)
  Bot Sig/Pwr w0.075: v2(18.314,14.114) 18.736,14.114 R20.1@19.175,13.675 ; D2.1@18.56,13.691 18.576,13.675 R20.1@19.175,13.675 ; R20.1@19.225,13.675 R20.1@19.175,13.675 ; J4.16@22.745,7.35 22.96,7.35 23.209,7.599 23.209,8.855 23.925,9.571 23.925,11.478 23.951,11.504 23.951,11.676 v2(23.975,11.7)
NetD3_1: D3.1 J4.18 R19.1 | length 13.2
  GND3 w0.075: v6(20.175,14.6) 20.175,14.613 20.25,14.687 v2(20.25,14.7) ; v2(24.275,11.65) 24.277,11.652 24.277,11.836 v6(24.28,11.838)
  Pwr w0.075: v6(20.175,14.6) 20.84,14.6 21.053,14.387 21.674,14.387 cw(c21.674,14.312) 21.695,14.384 21.975,14.3 21.993,14.296 22.105,14.296 22.522,14.159 22.689,14.136 22.747,14.078 22.91,13.848 23.034,13.627 ccw(c23.35,13.804) 23.038,13.619 23.04,13.616 23.056,13.589 23.114,13.497 23.12,13.491 23.152,13.459 23.661,12.622 ccw(c23.992,12.823) 23.663,12.618 23.831,12.349 23.832,12.347 23.838,12.341 24.315,11.865 24.288,11.838 v6(24.28,11.838)
  Bot Sig/Pwr w0.075: D3.1@18.637,14.315 18.639,14.313 19.163,14.313 R19.1@19.25,14.225 19.25,14.441 19.509,14.7 v2(20.25,14.7) ; J4.18@22.745,6.95 22.96,6.95 23.359,7.349 23.359,8.793 24.075,9.509 24.075,11.416 24.275,11.616 v2(24.275,11.65)
NetD4_2: D4.2 J1.1 | length 6.4
  Top Sig/Pwr w0.4: D4.2@12.899,1.796 13.128,2.025 13.462,2.359 ; D4.2@13.025,1.4 13.175,1.55 13.175,1.978 13.509,2.312 13.658,2.46 13.707,2.46 ; 15.601,2.581 15.701,2.681 16.315,2.681 16.476,2.842 16.476,2.859 16.644,3.026 16.644,3.87 J1.1@16.641,3.873
  Top Sig/Pwr w0.5: 14.709,2.775 14.903,2.581 14.931,2.581
  Top Sig/Pwr w0.6: 13.707,2.46 14.015,2.768 14.717,2.768 ; 14.931,2.581 15.601,2.581
NetE1_1: E1.1 L8.2 | length 4.9
  Top Sig/Pwr w1: E1.1@1.4,1.75 1.4,0.925 ccw(c2.089,1.65) 2.087,0.65 5.4,0.65
NetIC1_A2: IC1.A2 L1.1 | length 1.7
  GND3 w0.4: v2(15.206,3.359) 15.5,3.653 15.5,4.714 v2(15.656,4.87)
  Bot Sig/Pwr w0.075: IC1.A2@15.2,3.35 15.2,3.353 v2(15.206,3.359)
NetIC1_B3: IC1.B3 R2.2 | length 1.4
  GND3 w0.075: v2(14.799,2.944) 15.555,2.944 15.581,2.918 15.662,2.838 15.662,2.638 v2(15.675,2.625)
  Bot Sig/Pwr w0.075: IC1.B3@14.8,2.95 IC1.B3@14.8,2.945 ; 15.645,2.352 15.645,2.375 15.675,2.405 v2(15.675,2.625) ; v2(14.799,2.944) IC1.B3@14.8,2.945
NetJ1_4: J1.4 R16.1 | length 1.4
  Top Sig/Pwr w0.075: J1.4@18.6,4.1 18.6,4.596 18.766,4.761 18.795,4.761 18.988,4.953 18.988,4.963 19.175,5.15 R16.1@19.175,5.196
NetJ2_25: J2.25 R47.2 | length 3.6
  Bot Sig/Pwr w0.075: R47.2@8.051,13.38 8.919,13.38 9.546,12.753 9.546,12.306 9.563,12.289 9.563,11.949 9.587,11.925 9.587,11.435 9.7,11.322 9.988,11.322 J2.25@10.056,11.254
NetJ2_26: J2.26 R48.1 | length 1.9
  Bot Sig/Pwr w0.075: J2.26@7.345,11.25 7.398,11.303 7.741,11.303 8.077,11.639 R48.1@8.077,12.674
NetJ2_27: J2.27 R46.1 | length 3.3
  GND1 w0.075: v3(9.458,12.178) 9.492,12.178 9.578,12.264 9.658,12.264 v1(9.682,12.288)
  GND3 w0.075: v2(9.02,12.259) 9.048,12.259 9.189,12.118 v6(9.218,12.118)
  Sig1 w0.075: v4(9.268,12.139) 9.288,12.158 9.438,12.158 v3(9.458,12.178)
  Pwr w0.075: v6(9.218,12.118) 9.247,12.118 v4(9.268,12.139)
  Bot Sig/Pwr w0.075: J2.27@7.345,10.85 7.565,10.85 8.132,11.417 8.169,11.417 8.263,11.511 8.263,11.993 8.529,12.259 v2(9.02,12.259)
NetJ2_29: J2.29 R45.1 | length 3.7
  Top Sig/Pwr w0.075: R45.1@10.285,11.658 10.29,11.653 v1(10.29,11.637)
  GND1 w0.075: v3(10.172,11.623) 10.179,11.63 10.283,11.63 v1(10.29,11.637)
  GND3 w0.075: v2(7.575,10.125) 7.598,10.148 7.788,10.148 7.825,10.185 7.952,10.185 8.054,10.286 8.361,10.286 8.406,10.241 8.734,10.241 v6(8.747,10.229)
  Sig1 w0.075: v4(10.026,11.593) 10.143,11.593 v3(10.172,11.623)
  Pwr w0.075: v6(8.747,10.229) 9.162,10.644 9.162,10.762 9.994,11.593 v4(10.026,11.593)
  Bot Sig/Pwr w0.075: J2.29@7.345,10.05 7.417,10.122 7.575,10.122 v2(7.575,10.125)
NetJ2_31: J2.31 R44.1 | length 4.7
  Top Sig/Pwr w0.075: v1(10.043,11.107) 10.066,11.085 R44.1@10.291,11.085
  GND1 w0.075: v3(9.911,11.12) 9.917,11.114 10.037,11.114 v1(10.043,11.107)
  GND3 w0.075: v2(8.335,11.283) 8.359,11.307 8.543,11.307 8.553,11.317 8.689,11.317 8.734,11.272 8.941,11.272 9.05,11.164 v6(9.083,11.164)
  Sig1 w0.075: v4(9.217,11.188) 9.278,11.188 9.337,11.247 9.464,11.12 v3(9.911,11.12)
  Pwr w0.075: v6(9.083,11.164) 9.107,11.188 v4(9.217,11.188)
  Bot Sig/Pwr w0.075: J2.31@7.345,9.25 7.565,9.25 7.782,9.467 7.782,9.488 7.788,9.493 7.788,10.094 7.807,10.113 7.807,10.393 7.917,10.503 7.917,10.773 8.076,10.932 8.076,11.024 v2(8.335,11.283)
NetJ2_34: J2.34 R35.1 | length 9.1
  GND3 w0.075: v2(7.318,13.953) 7.41,13.862 v6(7.41,13.635) ; v2(8.475,11.725) 8.475,11.754 8.562,11.841 v6(8.562,11.871)
  Pwr w0.075: v6(7.41,13.635) 7.41,12.967 7.002,12.559 7.002,11.429 7.123,11.308 7.185,11.308 7.231,11.354 7.45,11.354 7.585,11.489 7.937,11.489 8.312,11.864 8.555,11.864 v6(8.562,11.871)
  Bot Sig/Pwr w0.075: J2.34@7.345,8.05 7.565,8.05 7.782,8.267 7.782,8.288 7.788,8.293 7.788,8.86 8.082,9.155 8.082,9.24 8.088,9.246 8.088,9.97 8.107,9.989 8.107,10.269 8.376,10.538 8.376,11.024 8.547,11.195 8.547,11.371 8.475,11.443 v2(8.475,11.725)
NetJ3_2: J3.2 R4.1 | length 47.9
  Top Sig/Pwr w0.2: R4.1@7.75,21.825 8.575,21.825 12.725,25.975 42.025,25.975 47.77,20.23 47.77,20.19 47.825,20.135 47.825,17.865 47.77,17.81 J3.2@47.77,16.5
NetJ3_4: J3.4 R49.1 | length 51.2
  Top Sig/Pwr w0.2: R49.1@6.75,21.825 6.75,21.875 7.275,22.4 8.761,22.4 12.611,26.25 42.139,26.25 48.475,19.914 48.475,16.799 48.48,16.794 48.48,16.175 47.77,15.465 J3.4@47.77,15.23
NetJ3_6: J3.6 R50.1 | length 54.1
  Top Sig/Pwr w0.2: R50.1@5.75,21.825 5.75,21.875 6.375,22.5 6.5,22.5 6.675,22.675 8.647,22.675 12.497,26.525 42.253,26.525 48.75,20.028 48.75,16.913 48.755,16.908 48.755,16.092 48.75,16.087 48.75,14.94 J3.6@47.77,13.96
NetJ7_2: J7.2 R36.1 | length 6.2
  Top Sig/Pwr w0.2: R36.1@35,14.175 35.025,14.15 35.025,13.825 35.125,13.725 38.15,13.725 39.25,12.625 J7.2@39.25,11.54
NetJ7_4: J7.4 R37.1 | length 7.5
  GND1 w0.2: v1(35.025,12.25) v3(35.3,12.25)
  Sig1 w0.2: v3(35.3,12.25) v4(35.6,12.25)
  Pwr w0.2: v4(35.6,12.25) 36.125,12.25 36.4,12.525 39.575,12.525 40.075,12.025 40.075,11.095 J7.4@39.25,10.27
NetJ7_6: J7.6 R38.1 | length 10.6
  GND1 w0.2: v1(35.13,10.275) 35.152,10.253 35.347,10.253 v3(35.35,10.25)
  Sig1 w0.2: v3(35.35,10.25) 35.625,10.25 35.95,10.575 35.95,11.825 36.65,12.525 39.725,12.525 40.175,12.075 40.175,9.5 39.841,9.166 39.416,9.166 J7.6@39.25,9
NetJ7_7: J7.7 R39.2 R41.2 | length 10.1
  Top Sig/Pwr w0.2: v1(36.343,3.708) 36.35,3.714 36.35,7.225 36.855,7.73 J7.7@37.98,7.73 ; v1(36.35,2.775) 37.5,1.625 37.5,1.025 ; R39.2@36.75,1 37.5,1 R41.2@38.25,1 38.283,1 R41.2@38.332,1.049
  GND1 w0.2: v3(36.343,3.522) v1(36.343,3.708) ; v1(36.35,2.775) v3(36.35,2.95)
  Sig1 w0.2: v3(36.343,3.522) 36.343,2.957 v3(36.35,2.95)
NetJ7_8: J7.8 R40.1 | length 11.5
  GND1 w0.2: v1(34.975,8.25) 35.1,8.125 v3(35.1,8.075)
  Sig1 w0.2: v3(35.1,8.075) 35.675,7.5 v4(35.675,7.475)
  Pwr w0.2: v4(35.675,7.475) 35.675,5.275 36,4.95 40,4.95 40.3,5.25 40.3,7.475 40.085,7.69 39.29,7.69 J7.8@39.25,7.73
NetJ7_9: J7.9 R43.1 | length 6.9
  Top Sig/Pwr w0.2: R43.1@34.965,4.248 35.017,4.196 35.017,3.518 35.364,3.172 37.565,3.172 37.98,3.587 J7.9@37.98,6.46
NetJ7_10: J7.10 R42.1 | length 6
  GND1 w0.2: v1(34.977,6.208) 34.977,5.917 v3(35.002,5.892)
  Sig1 w0.2: v3(35.002,5.892) 35.677,5.217 39.067,5.217 39.275,5.425 J7.10@39.275,6.425
NetL2_2: L2.2 U3.E5 | length 2
  GND3 w0.2: v6(17.9,2.975) 17.95,2.925 v2(17.95,2.875)
  GND3 w0.4: v2(16.777,4.367) 16.813,4.331 v6(16.813,4.237)
  Pwr w0.4: v6(16.813,4.237) 17.384,3.666 17.384,3.491 v6(17.9,2.975)
NetL3_2: L3.2 U5.B6 | length 1.5
  Top Sig/Pwr w0.18: v1(10.074,5.701) U5.B6@10.1,5.675
  Top Sig/Pwr w0.3: L3.2@8.976,6.294 8.976,6.058 9.038,5.996 9.261,5.996 9.356,5.901 v1(9.36,5.901)
  GND1 w0.18: v3(9.976,5.726) 9.98,5.722 10.009,5.722 10.026,5.705 10.071,5.705 v1(10.074,5.701)
  GND1 w0.3: v1(9.36,5.901) 9.469,5.901 v3(9.471,5.899)
  Sig1 w0.3: v3(9.471,5.899) 9.671,5.698 9.949,5.698 v3(9.976,5.726)
NetL4_1: L4.1 U5.D1 | length 0.7
  Top Sig/Pwr w0.185: L4.1@10.8,3.225 U5.D1@10.8,3.925
NetL6_2: L6.2 L8.1 L9.2
NetL10_2: L10.2 U5.A9 | length 4.1
  Top Sig/Pwr w0.1: v1(9.749,6.723) v1(9.749,6.723)
  Top Sig/Pwr w0.35: v1(7.389,9.206) 7.411,9.184 L10.2@7.426,9.184
  GND1 w0.1: v1@9.741,6.716 v1(9.749,6.723)
  GND1 w0.2: v3(9.311,6.802) 9.397,6.716 v1@9.741,6.716
  GND1 w0.35: v1(7.389,9.206) 7.389,9.13 v3(7.65,8.869)
  Sig1 w0.1: v4(9.175,6.8) 9.308,6.8 v3(9.311,6.802)
  Sig1 w0.35: v3(7.65,8.869) 7.936,8.869 v4(8.214,8.591)
  Pwr w0.35: v4(8.214,8.591) 8.102,8.48 8.102,7.821 9.124,6.8 v4(9.175,6.8)
NetMIC1_2: MIC1.2 R21.1 R23.2 | length 4.3
  GND3 w0.075: v2(25.26,14.342) 25.281,14.321 25.395,14.321 v6(25.416,14.3) ; v2(26.265,12.987) 26.286,13.007 26.286,13.149 v6(26.306,13.169)
  Pwr w0.075: v6(25.416,14.3) 25.631,14.3 26.306,13.626 v6(26.306,13.169)
  Bot Sig/Pwr w0.075: MIC1.2@23.798,14.087 24.457,14.087 24.693,14.324 25.242,14.324 v2(25.26,14.342) ; v2(26.265,12.987) 26.514,12.987 R23.2@26.525,12.976 ; R21.1@26.5,12.475 26.5,12.929 R23.2@26.514,12.942
NetR7_1: R7.1 U3.A2 | length 1.8
  Bot Sig/Pwr w0.075: U3.A2@19.55,1.675 19.779,1.675 20.046,1.408 20.046,0.82 20.128,0.737 20.153,0.737 20.415,0.475 20.473,0.475 R7.1@20.498,0.45
NetR9_1: R9.1 RT1.1 U3.D2 | length 5.3
  Sig2 w0.075: v4(16.021,1.333) 16.064,1.376 16.199,1.376 16.652,1.829 17.343,1.829 17.825,1.347 18.057,1.347 18.247,1.537 18.247,1.633 18.32,1.706 18.32,1.89 v4(18.363,1.933)
  GND3 w0.075: v6(15.865,1.09) 16.155,0.8 16.155,0.728 16.104,0.677 16.065,0.677 15.988,0.6 v2(15.954,0.6) ; v2(18.35,1.675) 18.35,1.709 18.4,1.759 18.4,1.777 v6@18.43,1.807
  Pwr w0.075: v6(15.865,1.09) 15.865,1.124 16.025,1.283 v4@16.025,1.325 ; v4(18.363,1.933) 18.363,1.878 v6(18.424,1.817)
  Bot Sig/Pwr w0.075: R9.1@15.642,0.501 15.642,0.442 15.703,0.382 15.954,0.382 ; v2(15.954,0.6) 15.954,0.382 ; RT1.1@16.149,0.425 16.106,0.382 15.954,0.382
NetR9_2: R9.2 U3.D3 | length 3.8
  Sig2 w0.075: v4(15.755,1.598) 15.755,1.659 15.878,1.781 15.878,1.796 15.937,1.855 15.937,1.857 16.443,2.363 17.191,2.363 17.193,2.365 v4(18.045,2.365)
  GND3 w0.075: v6(15.538,1.222) 15.538,1.189 15.591,1.136 v2(15.591,1.103) ; v6(18.046,2.171) 18.07,2.147 18.248,2.147 18.314,2.081 v2(18.348,2.081)
  Pwr w0.075: v6(15.538,1.222) 15.712,1.396 15.712,1.555 v4(15.755,1.598) ; v6@18.046,2.172 v4(18.045,2.365)
NetU5_A1: U5.A1 Y3.1 | length 2.4
  Top Sig/Pwr w0.075: Y3.1@8.085,3.47 8.085,3.378 8.113,3.35 8.205,3.35 8.363,3.192 9.056,3.192 9.1,3.236 9.1,3.625 9.4,3.925 U5.A1@9.75,3.925
NetU5_A2: U5.A2 Y3.3 | length 1
  Top Sig/Pwr w0.075: Y3.3@8.775,4.275 U5.A2@9.75,4.275
NetU5_F11: U5.F11 Y4.1 | length 1.6
  Top Sig/Pwr w0.075: U5.F11@11.5,7.425 11.5,7.448 11.807,7.755 11.807,8.669 Y4.1@11.988,8.85
NetU5_F12: U5.F12 Y4.2 | length 1.2
  Top Sig/Pwr w0.075: Y4.2@11.163,8.796 11.163,8.112 U5.F12@11.5,7.775
nRF_btn: SW3.1 SW3.2 U5.L1 | length 39.3
  Top Sig/Pwr w0.075: v1(13.25,3.907) U5.L1@13.25,3.925 ; v1(17.269,2.575) 17.623,2.575 17.685,2.513 17.747,2.513 17.773,2.486 18.127,2.486 18.153,2.513 19.997,2.513 20.178,2.331 20.178,0.938 20.217,0.899 v1(20.217,0.659) ; v1(22.206,0.426) 22.206,0.46 22.337,0.591 22.337,1.124 22.726,1.513 23.274,1.513 23.663,1.124 23.663,0.916 23.943,0.636 24.109,0.636 v1(24.133,0.612)
  Top Sig/Pwr w0.2: SW3.1@31.45,10.25 31.45,9.125 32.3,8.275 32.3,5.889 32.15,5.739 v5(32.15,3.325) ; SW3.1@31.475,10.425 v1(31.7,10.425)
  GND1 w0.075: v1(13.25,3.907) 13.25,3.911 13.614,4.275 14.322,4.275 14.453,4.144 14.453,3.555 14.497,3.511 14.844,3.511 15.294,3.061 16.539,3.061 16.685,2.915 16.685,2.517 16.839,2.363 17.081,2.363 17.269,2.551 v1(17.269,2.575) ; v1(20.217,0.659) 20.217,0.645 20.324,0.538 v3(20.324,0.524) ; v3(22.083,0.359) 22.111,0.359 22.178,0.426 v1(22.206,0.426) ; v1(24.133,0.612) 24.146,0.625 24.262,0.625 v3(24.275,0.638)
  GND1 w0.2: v1(31.625,14.675) v3(32.05,14.675) ; v1(31.7,10.425) 32.025,10.75 v3(32.05,10.75)
  Sig1 w0.075: v3(20.324,0.524) 20.642,0.206 21.93,0.206 v3(22.083,0.359) ; v3(24.275,0.638) 24.923,1.309 cw(c25.4,0.85) 25.575,1.489 25.716,1.489 25.736,1.504 26.19,1.841 26.222,1.873 26.763,2.413 26.763,3.792 27.208,4.237 29.063,4.237 29.075,4.225
  Sig1 w0.2: 29.075,4.225 29.526,3.774 29.526,3.538 30.068,2.996 31.821,2.996 v5(32.15,3.325) ; v3(32.05,10.75) v3(32.05,14.675)
nRF_P0.04: J4.20 U5.G10 | length 33.5
  Top Sig/Pwr w0.075: U5.G10@11.85,7.075 11.855,7.08 v1(11.865,7.08)
  GND1 w0.075: v1(11.865,7.08) 11.865,7.107 11.948,7.19 11.948,7.276 v3(11.968,7.296)
  GND3 w0.075: v6(22.85,4.909) 22.874,4.933 22.874,5.025 23.024,5.175 23.309,5.175 23.475,5.009 23.475,4.846 23.528,4.793 23.528,4.731 v2(23.552,4.707)
  Sig1 w0.075: v3(11.968,7.296) 12.002,7.296 12.196,7.491 12.196,7.61 12.21,7.623 12.21,7.735 12.296,7.822 12.296,12.024 13.234,12.961 13.234,13.349 13.577,13.692 13.643,13.692 14.264,14.312 15.715,14.312 16.224,14.312 16.901,13.635 17.969,13.635 18.114,13.779 20.453,13.779 22.482,11.75 22.57,11.75 22.875,11.445 22.875,10.106 23.616,9.365 24.771,9.365 24.878,9.471 v4(24.935,9.471)
  Pwr w0.075: v6(22.85,4.909) 23.028,4.731 23.374,4.731 23.436,4.794 23.841,4.794 23.85,4.802 24.401,4.802 24.556,4.957 24.791,4.957 24.905,4.843 24.967,4.843 25.337,5.213 25.337,6.701 25.313,6.725 25.313,7.121 25.071,7.363 24.675,7.363 24.431,7.607 24.431,8.056 24.935,8.56 v4(24.935,9.471)
  Bot Sig/Pwr w0.075: J4.20@22.745,6.55 22.799,6.496 23.215,6.496 23.286,6.425 23.286,6.026 23.338,5.974 23.338,5.141 23.382,5.096 23.382,4.994 23.496,4.88 23.496,4.797 23.552,4.741 v2(23.552,4.707)
nRF_P0.05: J4.22 U5.F10 | length 32
  Top Sig/Pwr w0.075: U5.F10@11.5,7.075 11.518,7.075 v1(11.526,7.068)
  GND1 w0.075: v1(11.526,7.068) 11.526,7.097 11.625,7.196 v3(11.625,7.225)
  GND3 w0.075: v6(23.17,4.944) 23.17,4.918 23.249,4.839 v2(23.249,4.814)
  Sig1 w0.075: v3(11.625,7.225) 11.765,7.365 11.765,7.393 12.06,7.689 12.06,7.797 12.146,7.884 12.146,12.086 13.084,13.023 13.084,13.411 13.515,13.842 13.581,13.842 14.202,14.462 16.286,14.462 16.963,13.785 17.907,13.785 18.051,13.929 20.254,13.929 20.525,14.2 21.223,14.2 21.361,14.062 21.481,14.062 21.525,14.019 21.525,13.274 21.55,13.249 21.55,12.897 22.522,11.925 22.607,11.925 23.025,11.507 23.025,10.168 23.571,9.622 23.994,9.622 24.073,9.701 v4(24.557,9.701)
  Pwr w0.075: v6(23.17,4.944) 23.779,4.944 23.788,4.952 24.339,4.952 24.494,5.107 24.853,5.107 24.905,5.056 24.967,5.056 25.187,5.275 25.187,6.639 25.163,6.663 25.163,7.059 25.009,7.213 24.613,7.213 24.281,7.545 24.281,8.118 24.702,8.539 24.702,9.228 24.557,9.373 v4(24.557,9.701)
  Bot Sig/Pwr w0.075: J4.22@22.745,6.15 22.96,6.15 23.136,5.974 23.136,5.963 23.188,5.912 23.188,5.064 23.225,5.026 23.225,4.837 v2(23.249,4.814)
nRF_P0.07/AMUX: J4.26 U3.C1 U5.J10 | length 27.4
  Top Sig/Pwr w0.075: v1(12.5,7.05) 12.5,7.062 12.513,7.075 U5.J10@12.55,7.075
  GND1 w0.075: v3(11.825,6.05) 11.83,6.05 12.13,6.35 12.13,6.557 12.448,6.874 12.448,6.911 12.476,6.939 12.476,7.026 v1(12.5,7.05)
  GND3 w0.075: v6(13.221,2.375) 13.443,2.597 13.505,2.597 13.742,2.36 v2(13.742,2.348) ; v2(15.236,2.263) 15.236,2.294 15.407,2.464 v6(15.407,2.495) ; v6(18.448,0.893) 18.464,0.909 18.759,0.909 v2(18.775,0.925) 19.14,0.925 19.334,0.731 19.334,0.662 19.459,0.537 19.845,0.537 20.019,0.711 20.436,0.711 20.461,0.686 20.488,0.66 20.533,0.614 20.715,0.614 v2(20.867,0.462) ; v2(22.24,2.459) 22.24,2.425 22.275,2.39 22.275,2.325 22.45,2.15 22.622,2.15 22.808,1.964 22.808,1.788 22.595,1.575 22.382,1.575 v2@22.378,1.578
  Sig1 w0.075: v3(11.825,6.05) 11.825,5.658 11.884,5.599 11.884,4.955 12.017,4.821 12.017,4.195 12.239,3.973 12.337,3.973 12.413,3.897 12.413,3.494 12.034,3.114 v4(12.034,2.772)
  Pwr w0.075: v4(12.034,2.772) 12.48,2.325 12.971,2.325 13.009,2.363 13.209,2.363 v6(13.221,2.375) ; v6(15.407,2.495) 15.791,2.495 16.285,2 16.572,2 16.94,1.632 17.307,1.632 17.794,1.145 17.833,1.145 18.098,0.88 18.435,0.88 v6(18.448,0.893)
  Bot Sig/Pwr w0.075: v2(13.742,2.348) 13.742,2.314 13.629,2.201 13.629,1.555 13.629,0.82 14.112,0.337 14.852,0.337 15.037,0.523 15.037,2.065 v2(15.236,2.263) ; U3.C1@18.75,1.275 18.763,1.263 18.763,0.937 v2(18.775,0.925) ; v2(20.867,0.462) 20.9,0.462 20.974,0.387 21.903,0.387 22.128,0.613 22.142,0.626 cw(c23.88,0.122) 22.172,0.722 22.172,1.216 22.402,1.446 22.402,1.488 22.399,1.499 v2(22.375,1.575) ; 21.649,3.188 21.649,3.135 21.983,2.802 21.983,2.716 v2(22.24,2.459) ; 21.649,3.188 21.649,3.647 21.649,4.344 21.693,4.387 21.697,4.387 21.886,4.577 22.108,4.577 22.302,4.771 22.302,5.306 22.346,5.35 J4.26@22.745,5.35
nRF_P0.12_GAP_GPIO64: J4.12 J5.10 U5.J6 U10.4 | length 34.6
  Top Sig/Pwr w0.075: J5.10@8.718,11.586 8.824,11.586 v1(8.834,11.576) ; U5.J6@12.55,5.675 12.557,5.675 v1(12.562,5.67)
  Top Sig/Pwr w0.18: v1(22.212,9.054) 22.216,9.05 U10.4@22.225,9.05
  GND1 w0.075: v3(8.678,11.622) 8.7,11.599 8.811,11.599 v1(8.834,11.576) ; v3(12.418,5.699) 12.433,5.685 12.547,5.685 v1(12.562,5.67) ; v1(22.212,9.054) 22.214,9.052 22.388,9.052 v3(22.389,9.05)
  Sig2 w0.075: v4(8.393,11.574) 8.393,11.563 8.213,11.383 8.213,11.2 8.172,11.158 8.172,11.118 8.098,11.045 8.098,10.457 8.202,10.353 8.202,9.161 7.951,8.91 7.951,7.744 8.288,7.408 8.288,7.381 8.618,7.051 8.618,6.986 9.284,6.32 9.284,5.915 9.326,5.873 9.326,4.122 9.749,3.7 12.077,3.7 12.331,3.953 12.331,4.225 ; v4(12.759,5.542) 12.759,5.109 12.331,4.681 12.331,4.225 ; v4(13.5,3.822) 13.476,3.822 13.072,4.225 12.331,4.225
  GND3 w0.075: v2(22.8,8.175) 22.8,8.403 22.766,8.437 22.766,8.946 22.8,8.98 v6@22.8,9.025 ; v6(22.812,9.026) 22.816,9.022 23.215,9.022 23.268,8.969 23.519,8.969 v2(23.713,8.775) ; v6(22.982,4.097) 22.996,4.111 23.37,4.111 v2(23.384,4.125)
  Sig1 w0.075: v4(8.393,11.574) 8.417,11.598 8.654,11.598 v3(8.678,11.622) ; v3(12.418,5.699) 12.452,5.699 12.566,5.585 12.715,5.585 v4(12.759,5.542) ; v4(13.5,3.822) 13.514,3.835 13.514,4.03 13.715,4.231 13.954,4.231 14.157,4.028 14.157,3.924 14.239,3.842 15.234,3.842 15.284,3.892 15.887,3.892 16.017,3.761 16.24,3.761 16.341,3.66 17.298,3.66 17.974,4.336 19.287,4.336 19.357,4.266 19.486,4.266 19.538,4.215 21.089,4.215 21.334,4.46 21.956,4.46 22.029,4.387 v4(22.712,4.387) ; v3(22.389,9.05) 22.399,9.041 22.611,9.041 v4(22.621,9.031)
  Pwr w0.075: v4(22.621,9.031) 22.623,9.028 22.809,9.028 v6(22.812,9.026) ; v4(22.712,4.387) 22.712,4.377 22.982,4.107 v6(22.982,4.097)
  Bot Sig/Pwr w0.075: J4.12@22.745,8.15 22.77,8.175 v2(22.8,8.175) ; v2(23.384,4.125) 23.384,4.139 23.764,4.519 23.764,4.795 23.732,4.827 23.732,4.855 23.532,5.056 23.532,5.322 23.488,5.366 23.488,6.531 23.546,6.59 23.546,6.859 23.53,6.874 23.53,7.596 23.713,7.778 v2(23.713,8.775)
nRF_P0.12_GAP_GPIO64_GAP: GAP1.K1 U10.5 | length 3
  Top Sig/Pwr w0.075: GAP1.K1@21.275,6.4 21.89,6.4 v1(22.03,6.54)
  GND1 w0.075: v1(22.03,6.54) 22.03,6.547 22.122,6.639 v3(22.122,6.646) ; v3(22.418,8.386) 22.421,8.388 22.421,8.601 v1(22.423,8.604)
  Sig1 w0.075: v3(22.122,6.646) 22.122,6.669 22.22,6.767 v4(22.22,6.79) ; v4(22.324,8.221) 22.324,8.258 22.418,8.352 v3(22.418,8.386)
  Pwr w0.075: v4(22.22,6.79) 22.22,8.056 22.324,8.16 v4(22.324,8.221)
nRF_P0.31: J4.2 J5.8 U5.C5 | length 34.9
  Top Sig/Pwr w0.075: v1(8.125,11.92) 8.128,11.917 8.699,11.917 J5.8@8.707,11.925 ; U5.C5@10.45,5.325 10.472,5.303 10.529,5.303 10.555,5.277 v1(10.589,5.277)
  GND1 w0.075: v3(8.055,11.786) 8.055,11.818 8.125,11.888 v1(8.125,11.92) ; v3(10.457,5.268) 10.461,5.273 10.584,5.273 v1(10.589,5.277)
  Sig2 w0.075: v4(7.386,11.091) 7.342,11.048 7.342,10.865 7.223,10.746 7.223,7.025 7.757,6.491 7.87,6.491 v4(7.913,6.448)
  GND3 w0.075: v6(22.403,10.009) 22.418,10.009 22.559,10.151 v2(22.574,10.151)
  Sig1 w0.075: v4(7.386,11.091) v4(7.386,11.091) 8.055,11.758 v3(8.055,11.786) ; v4(7.913,6.448) 8.166,6.701 8.372,6.701 8.911,6.162 8.999,6.162 9.208,5.953 9.208,5.79 9.569,5.43 10.295,5.43 v3(10.457,5.268)
  Pwr w0.075: v4(7.386,11.091) 7.096,11.091 6.852,11.336 6.852,13.242 7.144,13.534 7.144,13.669 7.397,13.922 7.498,13.922 7.622,13.798 7.622,13.12 8.036,12.707 8.487,12.707 8.714,12.933 8.714,13.258 8.757,13.356 8.91,13.51 9.128,13.51 9.531,13.113 ccw(c10.064,13.658) 9.725,12.975 9.953,12.862 10.43,12.862 10.664,12.628 11.624,12.628 11.722,12.726 11.722,12.828 12.309,13.415 12.473,13.415 12.559,13.329 14.908,13.329 16.186,12.051 17.154,12.051 17.767,12.663 18.386,12.663 18.421,12.699 18.519,12.699 18.543,12.723 18.648,12.723 18.755,12.829 18.897,12.829 19.209,13.141 20.106,13.141 20.998,12.249 20.998,11.855 21.447,11.407 21.447,11.245 21.279,11.077 21.279,10.292 21.451,10.121 21.496,10.121 21.668,9.949 22.257,9.949 v6(22.403,10.009)
  Bot Sig/Pwr w0.075: v2(22.574,10.151) 22.575,10.15 J4.2@22.745,10.15
nRF_P1.00_GAP_GPIO60: J4.4 U5.D10 U9.4 | length 25.9
  Top Sig/Pwr w0.075: v1(10.793,7.08) 10.798,7.075 U5.D10@10.8,7.075 ; v1(24.493,10.498) 24.469,10.474 24.469,10.399 24.442,10.372 24.442,10.345 24.437,10.34 24.437,9.263 24.65,9.05 U9.4@24.85,9.05
  GND1 w0.075: v1(10.793,7.08) 10.827,7.08 10.902,7.155 10.936,7.155 v3(10.96,7.179) ; v3(23.421,10.319) 23.455,10.319 23.553,10.417 24.17,10.417 24.257,10.504 24.487,10.504 v1(24.493,10.498)
  GND3 w0.075: v6(23.348,10.13) 23.359,10.13 23.359,9.99 v2(23.358,9.989)
  Sig1 w0.075: v3(10.96,7.179) 11.131,7.349 11.188,7.349 11.846,8.008 11.846,12.21 12.784,13.147 12.784,13.535 13.39,14.142 13.457,14.142 14.077,14.763 15.902,14.763 16.543,14.763 17.157,14.148 17.669,14.148 17.731,14.21 17.907,14.21 18.038,14.079 20.192,14.079 20.513,14.4 21.235,14.4 21.423,14.212 21.543,14.212 21.675,14.081 21.675,13.336 22.039,12.972 22.039,12.62 22.534,12.125 22.619,12.125 23.175,11.569 23.175,10.651 23.403,10.423 23.403,10.296 v4(23.388,10.282)
  Pwr w0.075: v6(23.348,10.13) 23.348,10.242 v4(23.388,10.282)
  Bot Sig/Pwr w0.075: J4.4@22.745,9.75 23.236,9.75 23.334,9.848 23.334,9.965 v2(23.358,9.989)